# EAGLE board protein-pcb v15 (EAGLE 9.7.0)
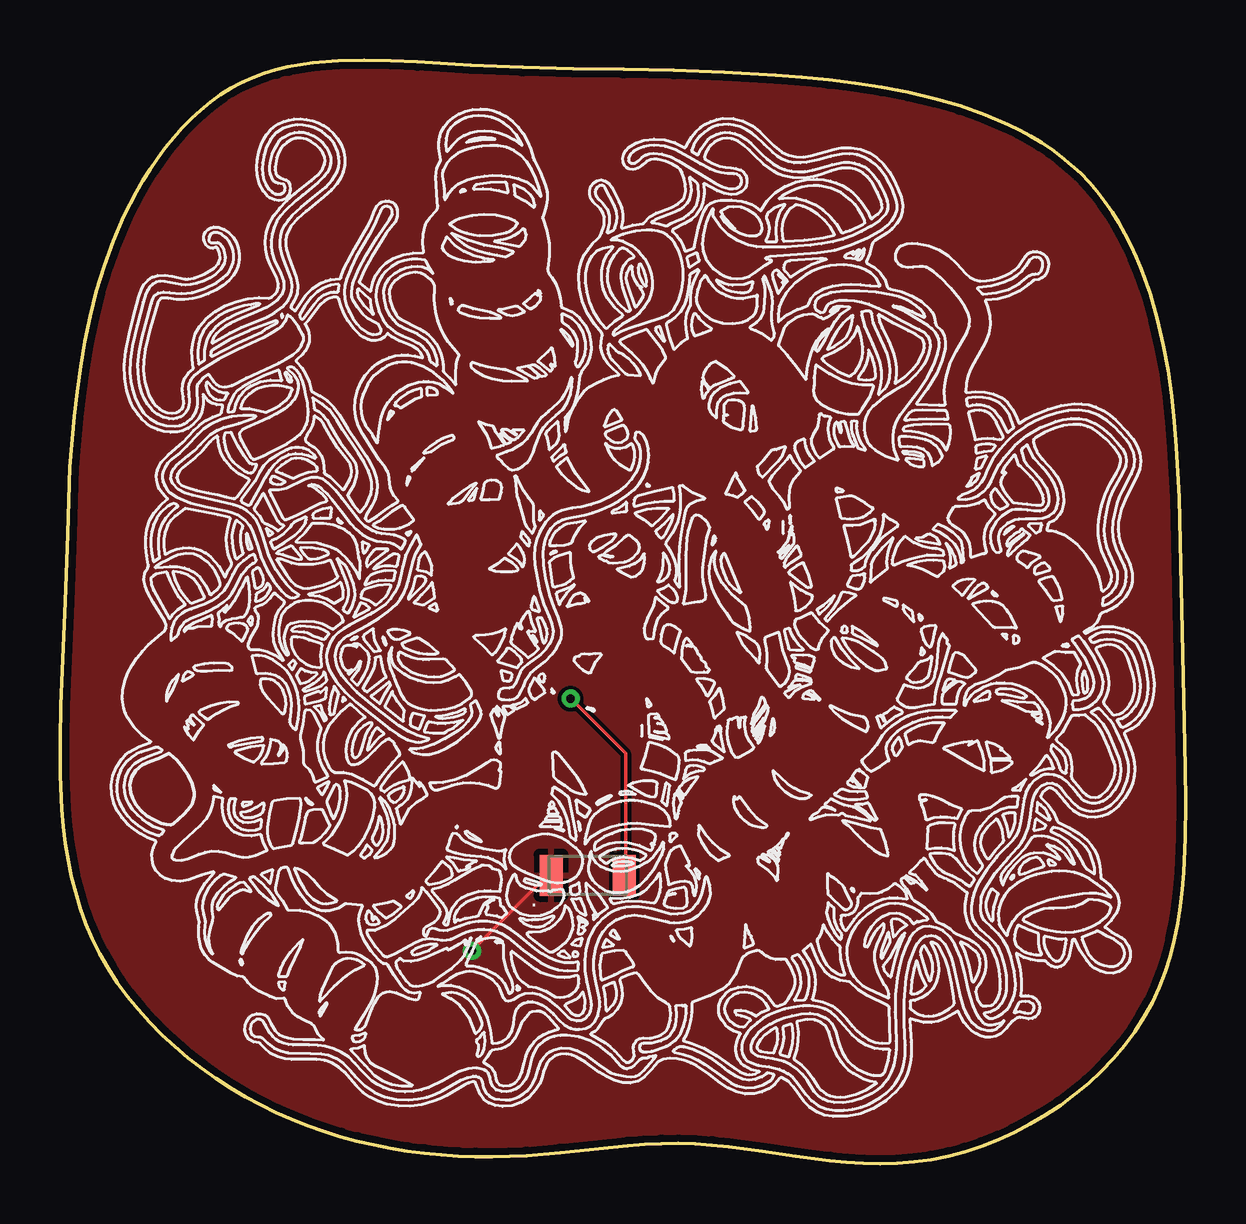
[diagram p0: board, top side]
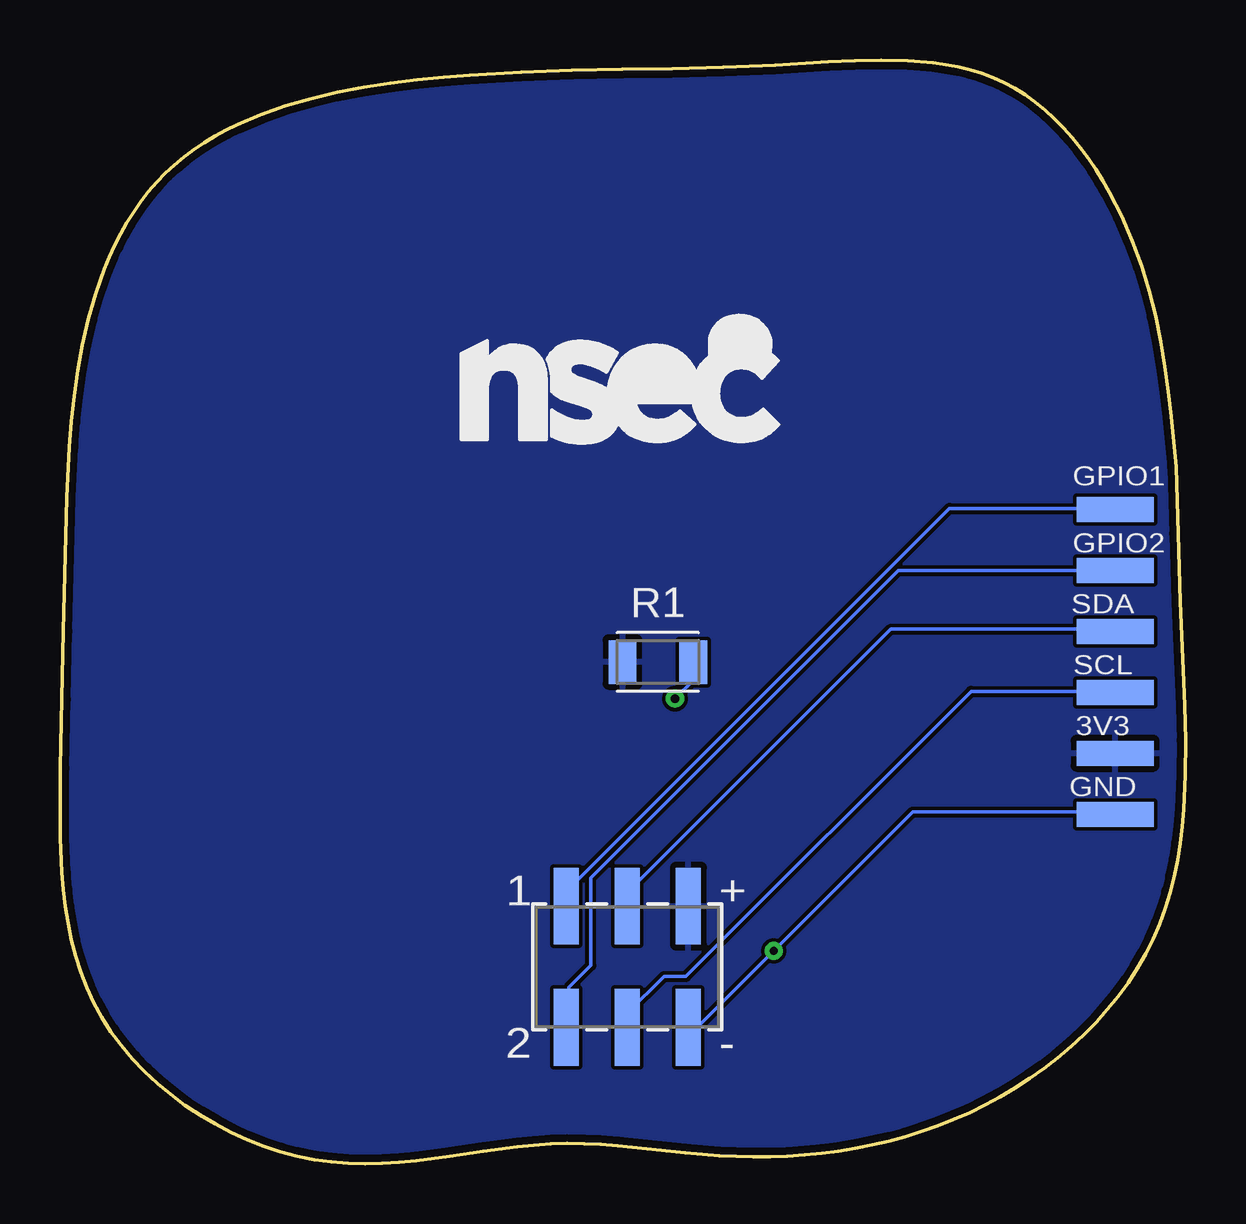
[diagram p1: board, bottom side, seen from below]

Size 46.9 x 46.01 mm. Coordinates in mm from the lower left corner, seen from the top.
Outline: 0.4,29.04 0.32,26.25 0.22,23.44 0.09,20.57 0.04,19.11 0,17.66 0.01,16.21 0.08,14.77 0.14,14.06 0.23,13.36 0.34,12.67 0.48,11.99 0.65,11.31 0.85,10.65 1.08,10 1.35,9.37 1.66,8.75 2.01,8.14 2.39,7.55 2.81,6.98 3.26,6.43 3.74,5.9 4.24,5.38 4.77,4.89 5.32,4.42 5.9,3.98 6.49,3.56 7.1,3.16 7.72,2.79 8.36,2.45 9,2.13 9.66,1.84 10.33,1.58 11,1.35 11.68,1.13 12.37,0.95 13.06,0.78 13.76,0.65 14.47,0.53 15.17,0.44 15.88,0.37 16.59,0.32 17.3,0.3 18.02,0.29 18.73,0.31 19.44,0.34 20.85,0.46 23.66,0.76 24.36,0.81 25.06,0.84 25.76,0.85 26.46,0.83 27.16,0.77 27.86,0.7 29.26,0.51 30.66,0.31 32.06,0.13 32.77,0.06 33.47,0.02 34.18,0 34.89,0.02 35.59,0.07 36.3,0.18 37.01,0.32 37.72,0.51 38.42,0.74 39.1,1.01 39.78,1.32 40.44,1.66 41.08,2.04 41.7,2.45 42.29,2.89 42.85,3.36 43.39,3.86 43.89,4.38 44.36,4.93 44.78,5.51 45.16,6.1 45.5,6.71 45.79,7.35 46.04,7.99 46.25,8.66 46.43,9.33 46.57,10.02 46.68,10.72 46.77,11.43 46.83,12.14 46.89,13.59 46.9,15.05 46.88,16.5 46.83,19.37 46.76,22.2 46.63,27.77 46.51,29.88 46.43,30.94 46.32,32 46.17,33.06 45.97,34.14 45.72,35.21 45.42,36.26 45.05,37.29 44.84,37.8 44.62,38.29 44.37,38.76 44.11,39.23 43.83,39.68 43.54,40.11 43.22,40.52 42.88,40.91 42.52,41.28 42.14,41.63 41.75,41.96 41.33,42.27 40.9,42.56 40.46,42.83 39.99,43.08 39.52,43.32 38.53,43.74 37.5,44.1 36.44,44.41 35.35,44.66 34.25,44.87 33.14,45.05 32.02,45.18 30.92,45.3 29.82,45.39 27.68,45.51 25.57,45.58 23.48,45.62 21.39,45.65 19.27,45.7 17.11,45.8 14.9,45.93 13.78,45.99 12.68,46.01 11.59,45.99 10.52,45.9 10,45.82 9.49,45.73 8.99,45.6 8.5,45.46 8.02,45.28 7.56,45.07 7.11,44.83 6.68,44.55 6.26,44.25 5.85,43.92 5.47,43.56 5.09,43.18 4.73,42.78 4.39,42.35 4.06,41.91 3.75,41.45 3.46,40.98 3.18,40.49 2.66,39.49 2.22,38.46 1.83,37.42 1.52,36.37 1.25,35.33 1.04,34.28 0.86,33.24 0.72,32.19 0.6,31.14 0.4,29.04
Copper layers (1*16): Top 0.035mm / dielectric 1.5mm / Bottom 0.035mm
Design rules "default *": minimum track width 6mil, minimum drill 0.35mm, track to track 6mil, track to pad 6mil, pad to pad 6mil, via to via 6mil, smd to smd 6mil, copper to edge 0.3mm, drill to drill 6mil, minimum pad ring 10mil, minimum via ring 8mil, stop-mask expansion 4mil, vias tented up to drill 0mil, thermal gap 10mil

## Footprints (pad centres in the part's own frame; a part is rotated, then mirrored left to right if it is on the bottom)
LEDC3216X75N_FLAT-R = smd 0.962 x 1.712: A 1.525,0; C -1.525,0
CONN6_M20-8760342_HRW = smd 1.041 x 3.2: 1 -2.54,2.525; 2 -2.54,-2.525; 3 0,2.525; 4 0,-2.525; 5 2.54,2.525; 6 2.54,-2.525
SAOPADBREAKOUT = smd 1.041 x 3.2: 1 -6.35,0; 2 -3.81,0; 3 -1.27,0; 4 1.27,0; 5 3.81,0; 6 6.35,0
RESC3216X70 = smd 1.165 x 1.815: 1 -1.475,0; 2 1.475,0

## Placement (x,y rotation side)
D1  LED_RED  [LEDC3216X75N_FLAT-R]  21.99,12.03 0 top
J1  M20-8760342CONN6_M20-8760342_HRW  [CONN6_M20-8760342_HRW]  23.26,8.22 0 bottom
J2  SAOPADBREAKOUT  [SAOPADBREAKOUT]  2.94,20.92 270 bottom
R1  [RESC3216X70]  21.99,20.92 0 bottom

## Library data of the parts
D1 = led; CATEGORY: LED; COLOR: RED; DESCRIPTION: CHIP LED FLAT; SUB-CATEGORY: CHIP; TYPE: FLAT_TOP
J1 = Library; COPYRIGHT: Copyright (C) 2024 Ultra Librarian. All rights reserved.; MANUFACTURER_PART_NUMBER: M20-8760342; MFR_NAME: Harwin
J2 = Library
R1 = Resistor; CATEGORY: Resistor; SUB-CATEGORY: Fixed

## Nets
3V3: J1.5 J2.5 R1.1
GND: D1.C J1.6 J2.6
GPIO1: J1.1 J2.1
GPIO2: J1.2 J2.2
N$2: D1.A R1.2
SCL: J1.4 J2.4
SDA: J1.3 J2.3

## Tracks (layer width: path | path; a pad name or v marks a point on that pad's centre or on a via)
3V3
  pour Bottom: -2.11,-9.49 54.93,-9.49 54.93,56.4 -5.87,56.4 -5.87,-5.72
GND  (via drill 0.35)
  Top 0.152: v17.16,8.88 20.36,12.08 D1.C
  Bottom 0.152: J2.6 2.99,14.67 11.37,14.67 v17.16,8.88 20.36,5.68 20.67,5.68 J1.6
  pour Top: -0.79,-3.23 -0.81,-3.26 -3.23,-5.68 46.09,-5.68 49.85,-1.91 49.85,51.32 -0.79,51.32
GPIO1
  Bottom 0.152: J2.1 2.99,27.32 9.85,27.32 25.7,11.47 25.7,10.86 J1.1
GPIO2
  Bottom 0.152: J2.2 11.98,24.73 24.78,11.92 24.78,8.27 25.7,7.35 25.7,5.83 J1.2
N$2  (via drill 0.35)
  Top 0.152: v21.28,19.39 23.56,17.11 23.56,12.08 D1.A
  Bottom 0.152: v21.28,19.39 20.52,20.15 R1.2
SCL
  Bottom 0.152: J1.4 23.26,6.29 21.74,7.81 20.82,7.81 8.93,19.7 2.99,19.7 J2.4
SDA
  Bottom 0.152: J1.3 23.26,11.31 12.29,22.29 2.99,22.29 J2.3

## Text on the board
bStop: protein